# EAGLE board Base v14 (EAGLE 9.7.0)
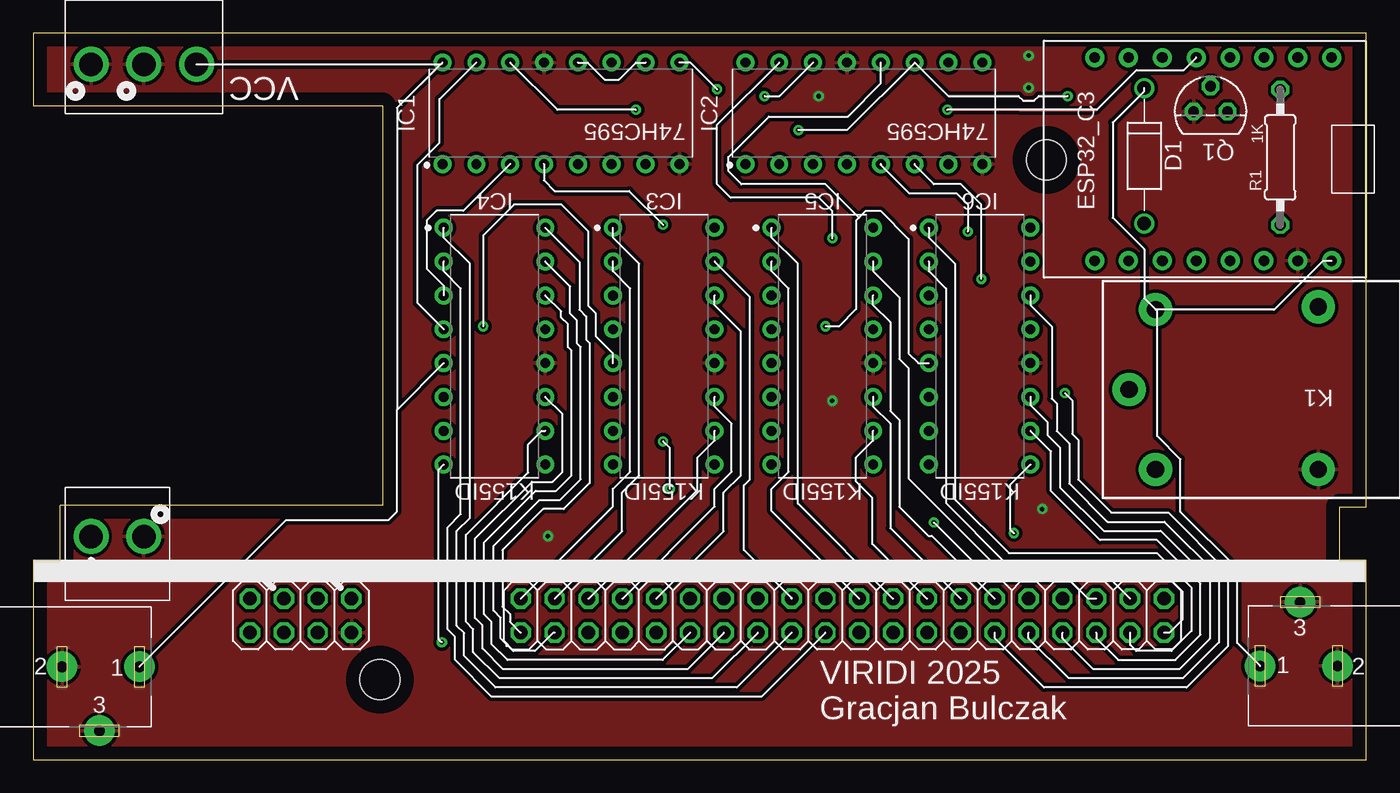
[diagram p0: board, top side]
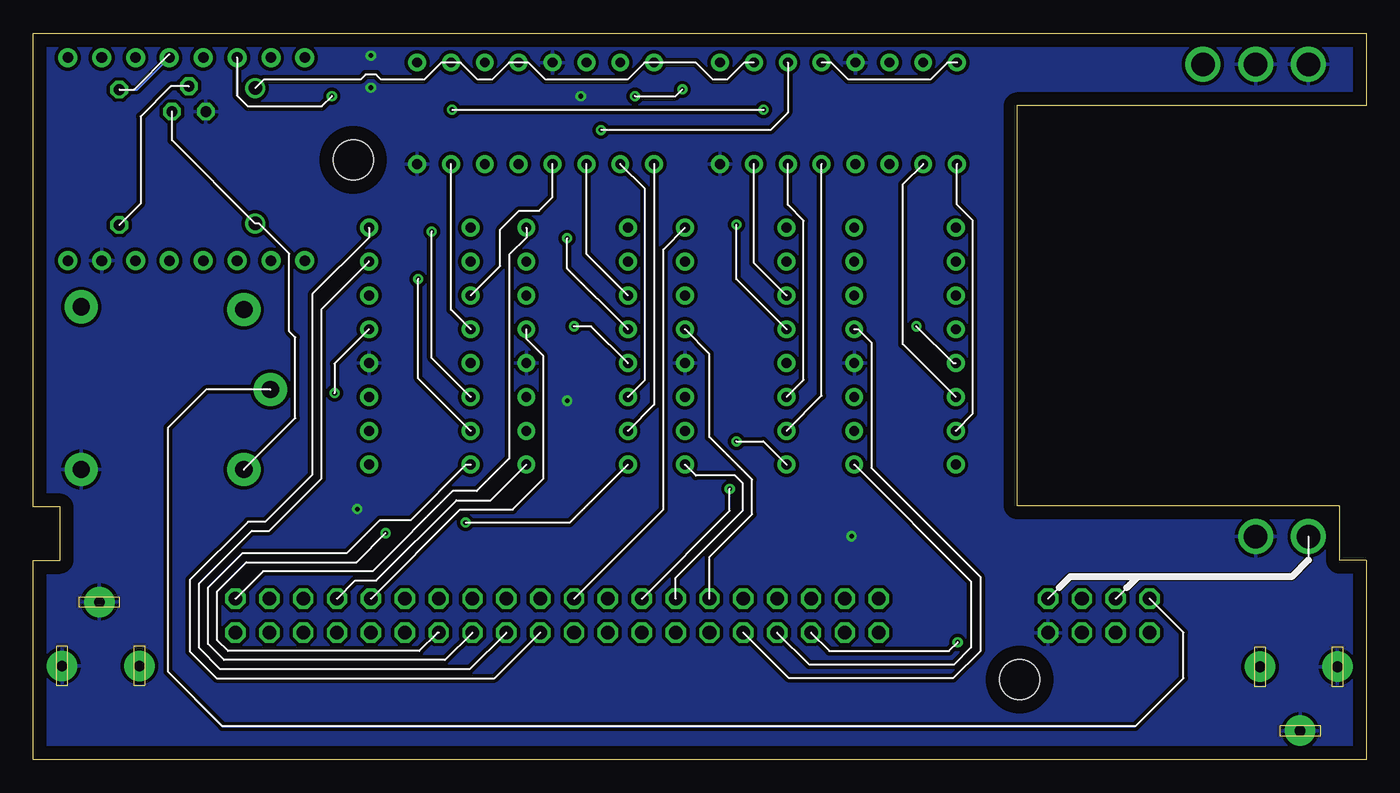
[diagram p1: board, bottom side, seen from below]

Size 100 x 54.5 mm. Coordinates in mm from the lower left corner, seen from the top.
Outline: 0,0 100,0 100,14.95 98,14.95 98,18.95 100,18.95 100,54.5 0,54.5 0,49.06 26.2,49.06 26.2,19.07 2,19.07 2,14.95 0,14.95 0,0
Copper layers (1*16): Top 0.035mm / dielectric 1.5mm / Bottom 0.035mm
Design rules "Fusion Electronics Design Rules": minimum track width 3mil, minimum drill 0.35mm, track to track 9mil, track to pad 9mil, pad to pad 6mil, via to via 6mil, smd to smd 6mil, copper to edge 40mil, drill to drill 6mil, minimum pad ring 10mil, minimum via ring 8mil, stop-mask expansion 4mil, vias tented up to drill 0mil, thermal gap 10mil
Holes 3 mm at 76,45 26,6

## Footprints (pad centres in the part's own frame; a part is rotated, then mirrored left to right if it is on the bottom)
DIODE-AXIAL = drill 1: 1 -5.08,0; 2 5.08,0
DIP762W53P254L1969H508Q16B = drill 0.743 pad 1.343: 1 -3.81,8.89; 2 -3.81,6.35; 3 -3.81,3.81; 4 -3.81,1.27; 5 -3.81,-1.27; 6 -3.81,-3.81; 7 -3.81,-6.35; 8 -3.81,-8.89; 9 3.81,-8.89; 10 3.81,-6.35; 11 3.81,-3.81; 12 3.81,-1.27; 13 3.81,1.27; 14 3.81,3.81; 15 3.81,6.35; 16 3.81,8.89
K155ID = drill 0.743 pad 1.343: 1 -3.81,8.89; 2 -3.81,6.35; 3 -3.81,3.81; 4 -3.81,1.27; 5 -3.81,-1.27; 6 -3.81,-3.81; 7 -3.81,-6.35; 8 -3.81,-8.89; 9 3.81,-8.89; 10 3.81,-6.35; 11 3.81,-3.81; 12 3.81,-1.27; 13 3.81,1.27; 14 3.81,3.81; 15 3.81,6.35; 16 3.81,8.89
694106301002 = drill 0.8 pad 2.286 slot 3.302 rotated 90: 1 13.6,0; 2 7.8,0 | drill 0.8 pad 2.286 slot 3.302: 3 10.6,-4.8
2X20 = drill 1.016 octagon: 1 -24.13,-1.27; 2 -24.13,1.27; 3 -21.59,-1.27; 4 -21.59,1.27; 5 -19.05,-1.27; 6 -19.05,1.27; 7 -16.51,-1.27; 8 -16.51,1.27; 9 -13.97,-1.27; 10 -13.97,1.27; 11 -11.43,-1.27; 12 -11.43,1.27; 13 -8.89,-1.27; 14 -8.89,1.27; 15 -6.35,-1.27; 16 -6.35,1.27; 17 -3.81,-1.27; 18 -3.81,1.27; 19 -1.27,-1.27; 20 -1.27,1.27; 21 1.27,-1.27; 22 1.27,1.27; 23 3.81,-1.27; 24 3.81,1.27; 25 6.35,-1.27; 26 6.35,1.27; 27 8.89,-1.27; 28 8.89,1.27; 29 11.43,-1.27; 30 11.43,1.27; 31 13.97,-1.27; 32 13.97,1.27; 33 16.51,-1.27; 34 16.51,1.27; 35 19.05,-1.27; 36 19.05,1.27; 37 21.59,-1.27; 38 21.59,1.27; 39 24.13,-1.27; 40 24.13,1.27
2X04 = drill 1.016 octagon: 1 -3.81,-1.27; 2 -3.81,1.27; 3 -1.27,-1.27; 4 -1.27,1.27; 5 1.27,-1.27; 6 1.27,1.27; 7 3.81,-1.27; 8 3.81,1.27
ZN5 = drill 1.3 pad 2.5: 11 8.89,0; 12 -5.31,-6.2; 14 -5.31,6; A1 6.89,6; A2 6.89,-6
TO92 = drill 0.813 octagon: 1 -1.27,0; 2 0,1.905; 3 1.27,0
PR-D2.3XL6.5MM = drill 0.813 octagon: 1 -4.953,0; 2 5.207,0
B2P-VH_396-2N = drill 1.75: 1 0,0; 2 3.96,0
B3P-VH_396_3N = drill 1.75: 1 0,0; 2 3.96,0; 3 7.92,0
ESP32_C3_SUPERMINI = drill 0.8 pad 1.422: 0 0,17.78; 1 0,15.24; 2 0,12.7; 3 0,10.16; 3.3V 0,5.08; 4 0,7.62; 5 15.24,0; 5V 0,0; 6 15.24,2.54; 7 15.24,5.08; 8 15.24,7.62; 9 15.24,10.16; 10 15.24,12.7; 20 15.24,15.24; 21 15.24,17.78; GND 0,2.54

## Placement (x,y rotation side)
D1  DIODEDIODE-AXIAL  [DIODE-AXIAL]  83.35,45.31 90 top
IC1  74HC595  [DIP762W53P254L1969H508Q16B]  39.59,48.5 90 top
IC2  74HC595  [DIP762W53P254L1969H508Q16B]  62.31,48.5 90 top
IC3  K155ID  [K155ID]  47.3,31.02 0 top
IC4  K155ID  [K155ID]  34.6,31.02 0 top
IC5  K155ID  [K155ID]  59.2,31.02 0 top
IC6  K155ID  [K155ID]  71,31.02 0 top
J1  694106301002  [694106301002]  -5.64,6.96 0 top
J2  694106301002  [694106301002]  105.64,7.03 180 top
JP2  PINHD-2X20  [2X20]  60.7,10.79 180 top
JP3  PINHD-2X4  [2X04]  20.06,10.79 180 top
K1  ZNS5106  [ZN5]  91.1,27.77 180 top
Q1  PNP  [TO92]  88.33,48.63 0 top
R1  1K  [PR-D2.3XL6.5MM]  93.55,45.07 90 top
U$1  B2P-VH  [B2P-VH_396-2N]  4.33,16.74 0 top
U$2  B3P-VH  [B3P-VH_396_3N]  12.25,52.17 180 top
U$5  ESP32_C3_SUPERMINI  [ESP32_C3_SUPERMINI]  97.41,37.44 90 top

## Library data of the parts
D1 = Tinkercad
IC1 IC2 = IC_Logic; CATEGORY: IC_Logic; DESCRIPTION: 8-Bit Shift Registers; MANUFACTURER: Generic; MPN: Generic; SUB-CATEGORY: Shift Register; TYPE: 8-bit
IC3-IC6 = K155ID
J1 J2 = DC Power Jacks; CREATED_BY: PCBLayout.com; DIGIKEY_PART_NUMBER: 732-5930-ND; MANUFACTURER: Wurth Electronics Inc.; MPN: 694106301002
JP2 = Connector; CATEGORY: Headers; DESCRIPTION: Header, Straight, 2x20 Position; MANUFACTURER: Generic; MPN: Generic; OPERATING_TEMPERATURE: Generic; PART_STATUS: Active; PITCH: 0.100" (2.54mm); ROHS_COMPLIANCE: Generic; SERIES: Generic; SUB-CATEGORY: Headers, Male Pins; TYPE: Board to Board or Cable, Unshrouded, Through Hole, Straight
JP3 = Connector; CATEGORY: Headers; DESCRIPTION: Header, Straight, 2x4 Position; MANUFACTURER: Generic; MPN: Generic; OPERATING_TEMPERATURE: Generic; PART_STATUS: Active; PITCH: 0.100" (2.54mm); ROHS_COMPLIANCE: Generic; SERIES: Generic; SUB-CATEGORY: Headers, Male Pins; TYPE: Board to Board or Cable, Unshrouded, Through Hole, Straight
K1 = relay
Q1 = Transistor; CATEGORY: Transistor; SUB-CATEGORY: BJT; TYPE: PNP
R1 = OPL_Resistor; MPN: FHCFR-1/4W-102J
U$1 = Connector; CATEGORY: Header; DESCRIPTION: Connector Header Through Hole 2 position 0.156" (3.96mm); MANUFACTURER: JST Sales America Inc.; MPN: B2P-VH; OPERATING_TEMPERATURE: -25°C ~ 85°C; PART_STATUS: Active; PITCH: 0.156" (3.96mm); ROHS_COMPLIANCE: RoHS non-compliant; SERIES: VH; SUBCATEGORY: Rectangular Connectors; TYPE: Header, Male Pin, Board to Cable/Wire, Through Hole
U$2 = Connector; CATEGORY: Header; DESCRIPTION: Connector Header Through Hole 3 position 0.156" (3.96mm); MANUFACTURER: JST Sales America Inc.; MPN: B3P-VH; OPERATING_TEMPERATURE: -25°C ~ 85°C; PART_STATUS: Active; PITCH: 0.156" (3.96mm); ROHS_COMPLIANCE: RoHS non-compliant; SERIES: VH; SUBCATEGORY: Rectangular Connectors; TYPE: Header, Male Pin, Board to Cable/Wire, Through Hole
U$5 = ESP32_C3_SUPERMINI

## Nets
170V: JP3.1 JP3.5 U$1.1
AGND: IC1.8 IC1.13 IC2.8 IC2.13 IC3.12 IC4.12 IC5.12 IC6.12 J1.2 J1.3 J2.2 J2.3 JP3.2 K1.14 Q1.1 U$1.2 U$2.2 U$2.3 U$5.GND
N$1: IC5.16 JP2.1
N$2: IC5.15 JP2.3
N$3: IC5.8 JP2.5
N$4: IC5.9 JP2.7
N$5: IC5.13 JP2.9
N$6: IC5.14 JP2.11
N$7: IC5.11 JP2.13
N$8: IC5.10 JP2.15
N$9: IC5.1 JP2.17
N$10: IC5.2 JP2.19
N$11: IC3.16 JP2.21
N$12: IC3.15 JP2.23
N$13: IC3.8 JP2.25
N$14: IC3.9 JP2.27
N$15: IC3.13 JP2.29
N$16: IC3.14 JP2.31
N$17: IC3.11 JP2.33
N$18: IC3.10 JP2.35
N$19: IC3.1 JP2.37
N$20: IC3.2 JP2.39
N$21: IC6.2 JP2.2
N$22: IC6.1 JP2.4
N$23: IC6.10 JP2.6
N$24: IC6.11 JP2.8
N$25: IC6.14 JP2.10
N$26: IC6.13 JP2.12
N$27: IC6.9 JP2.14
N$28: IC6.8 JP2.16
N$29: IC6.15 JP2.18
N$30: IC6.16 JP2.20
N$31: IC4.16 JP2.40
N$32: IC4.15 JP2.38
N$33: IC4.8 JP2.36
N$34: IC4.9 JP2.34
N$35: IC4.13 JP2.32
N$36: IC4.14 JP2.30
N$37: IC4.11 JP2.28
N$38: IC4.10 JP2.26
N$39: IC4.1 JP2.24
N$40: IC4.2 JP2.22
N$41: IC1.15 IC4.4
N$42: IC1.1 IC4.7
N$43: IC1.2 IC4.6
N$44: IC1.3 IC4.3
N$45: IC2.4 IC6.3
N$46: IC2.5 IC6.6
N$47: IC2.6 IC6.7
N$48: IC2.7 IC6.4
N$49: IC1.7 IC3.3
N$50: IC1.6 IC3.6
N$51: IC1.5 IC3.7
N$52: IC1.4 IC3.4
N$53: IC2.15 IC5.4
N$54: IC2.1 IC5.7
N$55: IC2.2 IC5.6
N$56: IC2.3 IC5.3
N$57: IC1.9 IC2.14
N$58: IC1.11 IC2.11 U$5.10
N$59: IC1.14 U$5.9
N$60: D1.1 K1.A1 Q1.3
N$61: Q1.2 R1.1
N$62: R1.2 U$5.8
N$63: JP3.7 K1.11
VCC: D1.2 IC1.10 IC1.12 IC1.16 IC2.10 IC2.12 IC2.16 IC3.5 IC4.5 IC5.5 IC6.5 J1.1 J2.1 K1.A2 U$2.1 U$5.5V

## Tracks (layer width: path | path; a pad name or v marks a point on that pad's centre or on a via)
170V
  Bottom 0.152: U$1.1 4.33,14.98 5.59,13.72 17.14,13.72 | 17.14,13.72 22.22,13.72 JP3.1 | JP3.5 17.14,13.72
AGND  (via drill 0.35)
  other vias: 58.93,49.78 38.61,16.76 75.69,18.8 59.94,26.92 74.68,50.42 74.68,52.83
  pour Top (isolate 0.254): 2.06,14.9 2.04,14.88 2.02,14.87 0.08,14.87 0.08,0.08 99.92,0.08 99.92,14.87 97.98,14.87 97.96,14.88 97.94,14.9 97.92,14.93 97.92,18.96 97.94,18.99 97.96,19.01 97.98,19.02 99.92,19.02 99.92,54.42 0.08,54.42 0.08,49.14 26.21,49.14 26.24,49.13 26.26,49.11 26.27,49.08 26.27,19.05 26.26,19.02 26.24,19 26.21,18.99 2.08,18.99 2.08,14.93
  pour Bottom (isolate 0.254): 2.06,14.9 2.04,14.88 2.02,14.87 0.08,14.87 0.08,0.08 99.92,0.08 99.92,14.87 97.98,14.87 97.96,14.88 97.94,14.9 97.92,14.93 97.92,18.96 97.94,18.99 97.96,19.01 97.98,19.02 99.92,19.02 99.92,54.42 0.08,54.42 0.08,49.14 26.21,49.14 26.24,49.13 26.26,49.11 26.27,49.08 26.27,19.05 26.26,19.02 26.24,19 26.21,18.99 2.08,18.99 2.08,14.93
N$1
  Bottom 0.152: IC5.16 63.01,39.18 64.29,37.9 64.29,22.58 66.73,20.14 68.54,20.14 74.56,14.12 82.77,14.12 JP2.1
N$2
  Top 0.152: IC5.15 63.01,36.64 64.98,34.67 64.98,30.07 65.66,29.38 65.66,21.08 72.62,14.12 80.23,14.12 JP2.3
N$3  (via drill 0.35)
  Top 0.152: v67.56,17.78 71.91,13.44 77.78,13.44 79.15,12.06 JP2.5
  Bottom 0.152: v67.56,17.78 59.74,17.78 IC5.8
N$4
  Bottom 0.152: IC5.9 65.69,19.45 68.26,19.45 74.27,13.44 75.84,13.44 JP2.7
N$5
  Bottom 0.152: IC5.13 63.01,31.56 61.73,30.28 61.73,21.07 64.04,18.77 67.97,18.77 JP2.9
N$6
  Top 0.152: IC5.14 63.01,34.1 64.29,32.82 64.29,26.17 64.98,25.48 64.98,18.97 67.16,16.79 67.4,16.79 JP2.11
N$7
  Top 0.152: IC5.11 63.01,26.48 64.29,25.2 64.29,17.36 JP2.13
N$8
  Top 0.152: IC5.10 63.01,23.94 61.73,22.66 61.73,20.86 62.94,19.65 62.94,16.17 JP2.15
N$9
  Top 0.152: JP2.17 57.36,19.22 57.36,37.22 55.39,39.18 IC5.1
N$10
  Top 0.152: JP2.19 55.39,18.64 55.39,20.32 56.67,21.6 56.67,35.36 55.39,36.64 IC5.2
N$11
  Bottom 0.152: IC3.16 52.74,38.28 52.74,18.76 JP2.21
N$12
  Top 0.152: JP2.23 56.89,12.14 53.31,15.72 53.31,20.58 53.76,21.03 53.76,34.72 IC3.15
N$13  (via drill 0.35)
  Top 0.152: v47.24,23.88 47.75,23.37 v47.75,20.32
  Bottom 0.152: JP2.25 47.75,18.66 v47.75,20.32 | v47.24,23.88 45.24,23.88 IC3.8
N$14
  Bottom 0.152: JP2.27 51.81,13.63 46.76,18.68 46.76,20.73 47.34,21.31 50.29,21.31 IC3.9
N$15
  Bottom 0.152: IC3.13 49.27,30.45 49.27,24.2 46.08,21.01 46.08,18.4 49.27,15.21 JP2.29
N$16
  Top 0.152: IC3.14 51.11,34.1 53.08,32.13 53.08,21.32 51.8,20.03 51.8,17.13 JP2.31
N$17
  Top 0.152: JP2.33 51.11,18.98 51.11,20.32 52.39,21.6 52.39,25.2 51.11,26.48 IC3.11
N$18
  Top 0.152: JP2.35 49.83,20.24 49.83,22.66 51.11,23.94 IC3.10
N$19
  Top 0.152: IC3.1 43.49,39.18 45.46,37.22 45.46,21.32 44.18,20.03 44.18,17.13 JP2.37
N$20
  Top 0.152: JP2.39 43.49,18.98 43.49,20.32 44.77,21.6 44.77,35.36 43.49,36.64 IC3.2
N$21
  Top 0.152: IC6.2 67.19,36.64 68.47,35.36 68.47,19.24 72.9,14.81 84.03,14.81 86.2,12.63 86.2,10.48 85.25,9.53 JP2.2
N$22
  Top 0.152: JP2.4 82.29,8.6 82.74,8.15 85.4,8.15 86.89,9.64 86.89,12.92 84.31,15.49 73.19,15.49 69.16,19.52 69.16,37.22 67.19,39.18 IC6.1
N$23
  Top 0.152: JP2.6 79.75,9.11 81.39,7.47 85.68,7.47 87.57,9.36 87.57,13.2 84.3,16.48 80.02,16.48 76.35,20.15 76.35,23.13 IC6.10
N$24
  Top 0.152: IC6.11 74.81,26.6 76.09,25.32 76.09,24.36 77.03,23.42 77.03,20.43 80.3,17.16 84.58,17.16 88.26,13.48 88.26,9.07 85.97,6.78 79.54,6.78 77.21,9.11 JP2.8
N$25
  Top 0.152: IC6.14 74.81,34.1 76.41,32.5 76.41,27.09 76.78,26.72 76.78,24.64 77.72,23.7 77.72,20.72 80.59,17.85 84.86,17.85 88.94,13.77 88.94,8.79 86.25,6.1 77.68,6.1 74.67,9.11 JP2.10
N$26  (via drill 0.35)
  Top 0.152: JP2.12 72.13,9.11 75.83,5.41 86.53,5.41 89.63,8.51 89.63,14.05 85.15,18.54 80.87,18.54 78.41,21 78.41,23.98 77.94,24.45 77.94,26.95 v77.4,27.5
  Bottom 0.152: IC6.13 77.4,29.7 v77.4,27.5
N$27  (via drill 0.35)
  Top 0.152: v73.57,16.99 73.29,17.28 73.29,20.61 IC6.9
  Bottom 0.152: JP2.14 69.68,9.53 71.05,8.15 85.4,8.15 86.2,8.96 86.2,12.63 84.03,14.81 75.75,14.81 v73.57,16.99
N$28
  Bottom 0.152: IC6.8 67.52,22.13 71.67,17.98 73.98,17.98 76.47,15.49 84.31,15.49 86.89,12.92 86.89,8.67 85.68,7.47 69.11,7.47 JP2.16
N$29
  Bottom 0.152: JP2.18 67.25,6.78 85.97,6.78 87.57,8.39 87.57,13.2 83.61,17.16 82.3,17.16 78.38,21.08 78.38,33.8 IC6.15
N$30
  Bottom 0.152: JP2.20 65.4,6.1 86.25,6.1 88.26,8.11 88.26,13.48 83.89,17.85 82.59,17.85 79.07,21.37 79.07,34.92 74.81,39.18 IC6.16
N$31
  Top 0.152: JP2.40 35.75,10.35 35.75,10.92 35.2,11.47 35.2,15.73 38.26,18.79 39.79,18.79 41.75,20.75 41.75,31.25 41.48,31.52 41.48,33.24 40.97,33.75 40.97,37.35 IC4.16
N$32
  Top 0.152: JP2.38 39.01,9.53 37.64,8.15 36,8.15 35.66,8.5 35.5,8.5 35.5,8.65 35.06,9.09 35.06,10.63 34.51,11.19 34.51,16.01 37.98,19.48 39.51,19.48 41.06,21.03 41.06,30.96 40.79,31.24 40.79,32.96 40.28,33.47 40.28,35.5 IC4.15
N$33  (via drill 0.35)
  Top 0.152: v30.65,8.8 30.4,9.05 30.4,21.74 IC4.8
  Bottom 0.152: JP2.36 40.28,8.15 31.3,8.15 v30.65,8.8
N$34
  Bottom 0.152: JP2.34 41.78,7.11 30.94,7.11 29.64,8.41 29.64,13.36 IC4.9
N$35
  Bottom 0.152: JP2.32 43.3,6.1 30.99,6.1 28.96,8.13 28.96,13.72 37.13,21.89 37.13,31.3 38.12,32.29 IC4.13
N$36
  Top 0.152: JP2.30 47.21,7.47 35.56,7.47 34.38,8.65 34.38,10.35 33.83,10.9 33.83,16.3 37.69,20.16 39.23,20.16 40.38,21.32 40.38,30.68 40.11,30.95 40.11,32.68 39.6,33.18 39.6,33.64 IC4.14
N$37
  Top 0.152: IC4.11 39.69,25.93 39.69,21.6 38.94,20.85 37.41,20.85 33.14,16.58 33.14,10.62 33.69,10.06 33.69,8.34 35.25,6.78 49.07,6.78 JP2.28
N$38
  Top 0.152: JP2.26 50.92,6.1 34.96,6.1 33.01,8.05 33.01,9.78 32.45,10.33 32.45,16.86 37.13,21.54 37.13,23.66 38.14,24.67 IC4.10
N$39
  Top 0.152: IC4.1 30.79,39.18 32.76,37.22 32.76,18.14 31.77,17.15 31.77,10.05 32.32,9.5 32.32,7.77 34.68,5.41 52.77,5.41 JP2.24
N$40
  Top 0.152: IC4.2 30.79,36.64 32.07,35.36 32.07,18.42 31.08,17.43 31.08,9.76 31.64,9.21 31.64,7.49 34.4,4.72 54.63,4.72 JP2.22
N$41
  Top 0.152: IC4.4 28.82,34.26 28.82,44.63 30.48,46.29 30.48,49.56 IC1.15
N$42
  Bottom 0.152: IC1.1 30.7,41.63 29.51,40.44 29.51,25.95 IC4.7
N$43
  Bottom 0.152: IC4.6 34.76,31.18 34.76,43.17 IC1.2
N$44
  Top 0.152: IC1.3 32.27,41.19 30.26,41.19 29.51,40.44 29.51,36.84 30.79,35.56 IC4.3
N$45
  Bottom 0.152: IC6.3 64.98,37.04 64.98,39.76 63.54,41.19 62.05,41.19 61.05,42.19 IC2.4
N$46  (via drill 0.35)
  Top 0.152: IC2.5 63.59,44.62 65.71,42.49 69.27,42.49 70.1,41.66 v70.1,39.62
  Bottom 0.152: IC6.6 70.1,30.12 v70.1,39.62
N$47  (via drill 0.35)
  Top 0.152: v71.12,36.07 71.12,41.66 69.6,43.18 67.56,43.18 66.12,44.62 IC2.6
  Bottom 0.152: IC6.7 71.12,28.6 v71.12,36.07
N$48
  Bottom 0.152: IC6.4 68.67,33.77 IC2.7
N$49
  Bottom 0.152: IC3.3 45.94,37.27 IC1.7
N$50
  Bottom 0.152: IC1.6 43.4,41.63 42.21,40.44 42.21,28.49 IC3.6
N$51
  Bottom 0.152: IC3.7 40.85,27.3 IC1.5
N$52  (via drill 0.35)
  Top 0.152: v47.24,40.13 44.7,42.67 39.12,42.67 38.31,43.47 IC1.4
  Bottom 0.152: IC3.4 47.24,36.04 v47.24,40.13
N$53  (via drill 0.35)
  Top 0.152: v59.94,39.12 59.94,41.15 58.93,42.16 52.32,42.16 51.31,43.18 51.31,47.66 IC2.15
  Bottom 0.152: IC5.4 59.94,36.84 v59.94,39.12
N$54
  Bottom 0.152: IC5.7 53.42,26.64 53.42,43.12 IC2.1
N$55
  Bottom 0.152: IC5.6 54.11,28.49 54.11,42.84 IC2.2
N$56
  Bottom 0.152: IC5.3 58.51,37.95 IC2.3
N$57  (via drill 0.35)
  Top 0.152: v51.31,50.29 49.28,52.32 48.49,52.32 IC1.9 | v54.86,49.78 55.98,49.78 IC2.14
  Bottom 0.152: v54.86,49.78 51.82,49.78 v51.31,50.29
N$58  (via drill 0.35)
  Top 0.152: v57.4,47.24 61.06,47.24 IC2.11 68.65,49.78 73.91,49.78 74.27,49.43 75.08,49.43 75.44,49.78 v77.6,49.78
  Bottom 0.152: IC1.11 43.4,48.55 44.7,47.24 v57.4,47.24 | U$5.10 84.71,50.96 84.71,49.83 83.91,49.03 78.35,49.03 v77.6,49.78
N$59  (via drill 0.35)
  Top 0.152: v45.21,48.77 39.32,48.77 IC1.14 | U$5.9 86.31,51.74 82.77,51.74 79.77,48.74 73.98,48.74 73.96,48.77 v68.58,48.77
  Bottom 0.152: v68.58,48.77 v45.21,48.77
N$60
  Bottom 0.152: K1.A1 80.35,25.63 80.35,31.69 80.79,32.13 80.79,37.96 83.07,40.23 D1.1 89.6,46.48 Q1.3
N$61
  Bottom 0.152: Q1.2 89.68,50.53 91.95,48.26 91.95,41.72 R1.1
N$62
  Bottom 0.152: R1.2 92.19,50.27 U$5.8
N$63
  Bottom 0.152: K1.11 87.04,27.77 89.92,24.89 89.92,6.6 85.8,2.49 17.32,2.49 13.72,6.1 13.72,9.53 JP3.7
VCC  (via drill 0.35)
  Top 0.152: J1.1 18.97,17.97 26.65,17.97 27.29,18.61 27.29,26.25 | 27.29,26.25 IC4.5 | IC3.5 43.49,30.48 42.21,31.76 42.21,33.48 41.66,34.04 41.66,39.62 39.62,41.66 36.07,41.66 33.74,39.33 v33.74,32.51 | IC6.5 66.39,29.75 65.66,30.48 65.66,39.07 63.54,41.19 62.48,41.19 61.95,40.66 | 61.95,40.66 61.73,40.44 61.73,33.79 60.45,32.51 v59.44,32.51 | 61.95,40.66 59.44,43.18 53.12,43.18 52.14,44.16 52.14,45.22 55.18,48.26 61.1,48.26 63.59,50.74 IC2.12 | 27.29,26.25 27.29,48.9 IC1.16 30.55,52.17 U$2.1 | D1.2 83.35,50.16 80.98,47.8 80.98,40.67 83.35,38.3 83.35,34.63 K1.A2 84.33,33.77 | 84.33,33.77 93.1,33.77 96.77,37.44 U$5.5V | J2.1 90.32,8.75 90.32,14.34 86.07,18.58 86.07,22.54 84.33,24.28 84.33,33.77 | IC1.12 41.58,52.31 42.86,51.03 43.93,51.03 45.21,52.31 IC1.10
  Bottom 0.152: v33.74,32.51 30.98,29.75 IC4.5 | IC5.5 58.15,32.51 v59.44,32.51 | IC1.16 31.42,52.31 32.7,51.03 38.85,51.03 40.13,52.31 IC1.12 | IC1.10 46.66,52.31 47.94,51.03 49.01,51.03 50.29,52.31 IC2.16 54.15,52.31 55.43,51.03 61.58,51.03 62.86,52.31 IC2.12 64.31,52.31 65.59,51.03 66.66,51.03 67.94,52.31 IC2.10 69.39,52.31 70.67,51.03 73.89,51.03 74.27,51.41 75.08,51.41 75.46,51.03 82.71,51.03 D1.2

## Text on the board
tPlace: VCC | VIRIDI 2025 / Gracjan Bulczak